# EAGLE board panel (EAGLE 7.5.0)
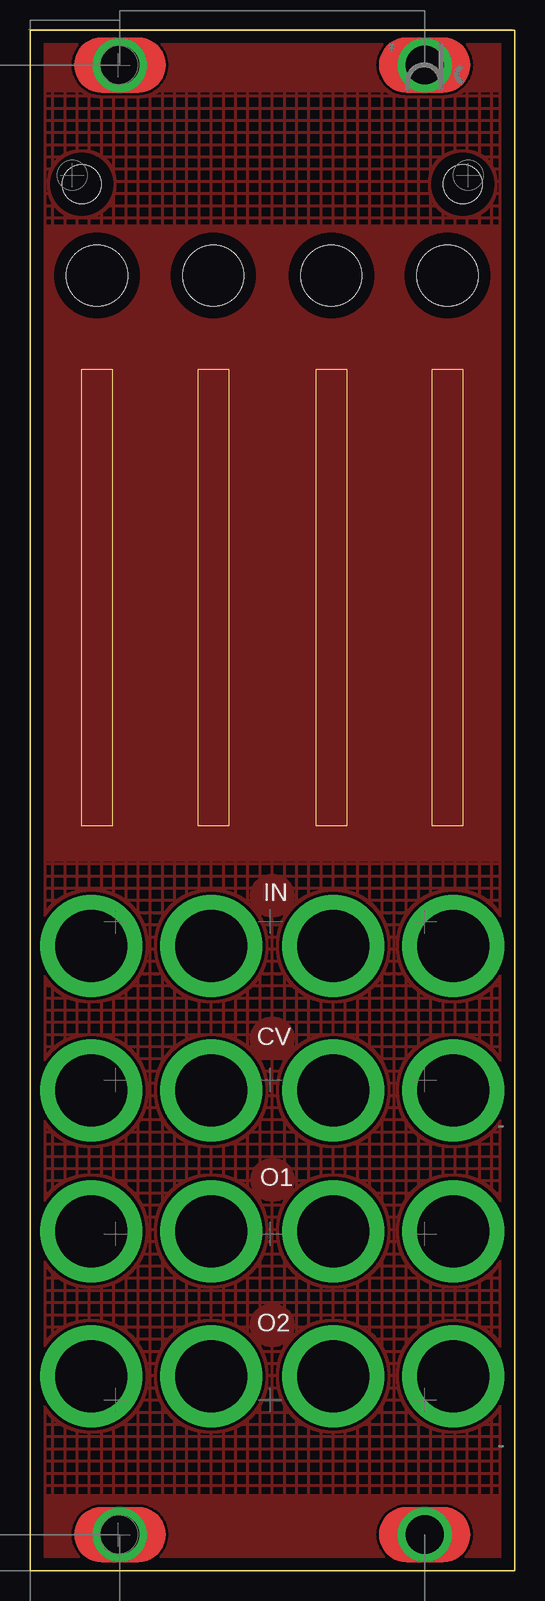
[diagram p0: board, top side]
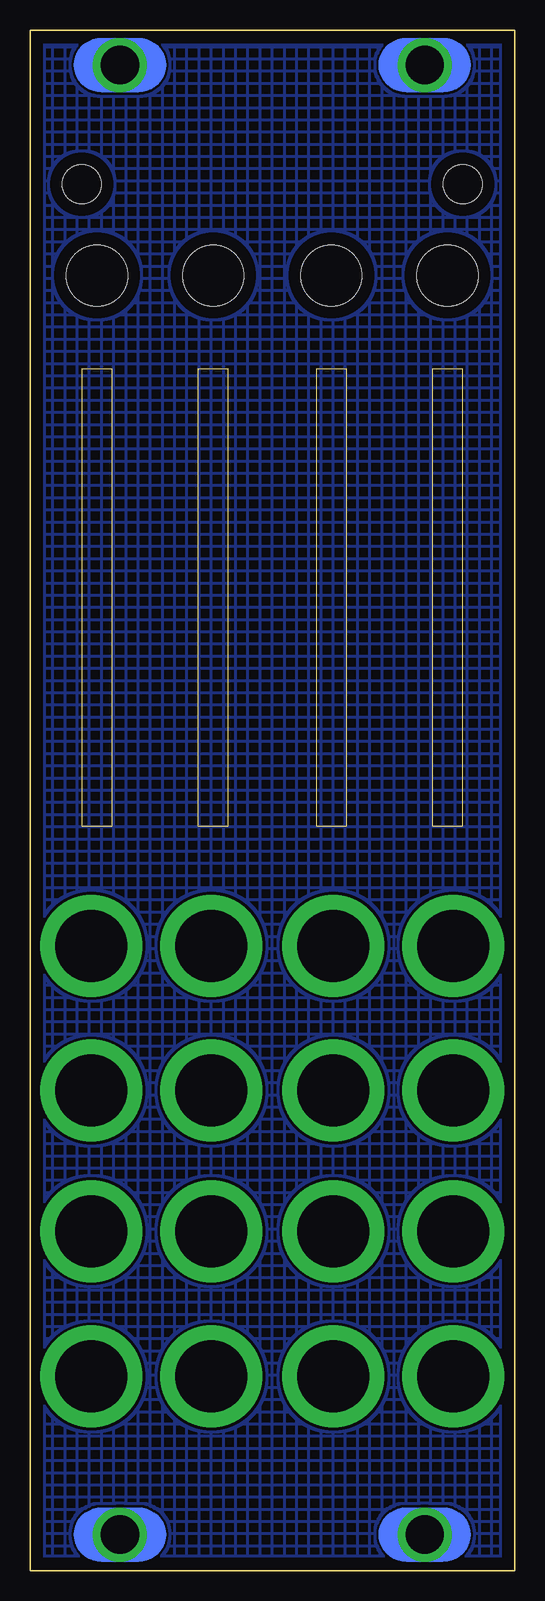
[diagram p1: board, bottom side, seen from below]

Size 40.39 x 128.42 mm. Coordinates in mm from the lower left corner, seen from the top.
Outline: 0,128.42 0,0 40.39,0 40.39,128.42 0,128.42
Copper layers (1*16): Top 0.035mm / dielectric 1.5mm / Bottom 0.035mm
Design rules "default *": minimum track width 10mil, minimum drill 0.61mm, track to track 8mil, track to pad 8mil, pad to pad 8mil, via to via 8mil, smd to smd 8mil, copper to edge 40mil, drill to drill 8mil, minimum pad ring 0mil, minimum via ring 8mil, stop-mask expansion 4mil, vias tented up to drill 15mil, thermal gap 10mil
Net classes: 0 default: width 2.54 mm, drill 0.3 mm, clearance 0.152 mm, clearance 0.152 mm to class 1, clearance 0.152 mm to class 2; 1 hipriority: width 2.54 mm, drill 0.3 mm, clearance 0.152 mm, clearance 0.152 mm to class 0, clearance 0.152 mm to class 2; 2 powa: width 0.305 mm, drill 0.3 mm, clearance 0.152 mm, clearance 0.152 mm to class 0, clearance 0.152 mm to class 1
Holes 3.23 mm at 4.32,115.57 36.07,115.57
Holes 5.08 mm at 25.11,107.95 5.59,107.95 15.27,107.95 34.8,107.95
Milling: 16 lines

## Footprints (pad centres in the part's own frame; a part is rotated, then mirrored left to right if it is on the bottom)
RES_0805 = drill 6 pad 8.5: 1 0,0
Pad = drill 3.2 pad 4.5: 1 0,0

## Placement (x,y rotation side)
Pad1  [RES_0805]  25.27,28.3 0 top
Pad2  [RES_0805]  15.11,16.18 0 top
Pad3  [RES_0805]  5.11,16.18 0 top
Pad4  [RES_0805]  5.11,28.3 0 top
Pad5  [RES_0805]  15.11,28.3 0 top
Pad6  [RES_0805]  25.27,16.18 0 top
Pad7  [RES_0805]  35.28,28.3 0 top
Pad8  [RES_0805]  15.11,40 0 top
Pad9  [RES_0805]  5.11,40 0 top
Pad10  [Pad]  32.89,3 0 top
Pad11  [Pad]  7.49,3 0 top
Pad12  [RES_0805]  35.28,16.18 0 top
Pad13  [Pad]  7.49,125.5 0 top
Pad14  [Pad]  32.89,125.5 0 top
Pad15  [RES_0805]  5.11,52.07 0 top
Pad16  [RES_0805]  15.11,52.07 0 top
Pad17  [RES_0805]  35.28,52.07 0 top
Pad18  [RES_0805]  35.28,40 0 top
Pad19  [RES_0805]  25.27,52.07 0 top
Pad20  [RES_0805]  25.27,40 0 top

## Library data of the parts
Pad1-Pad20 = common

## Tracks (layer width: path | path; a pad name or v marks a point on that pad's centre or on a via)
N$1
  pour Top: 22.06,56.26 21.97,56.81 21.71,57.31 21.29,57.7 20.77,57.96 20.19,58.05 19.61,57.96 19.09,57.7 18.68,57.31 18.41,56.81 18.32,56.26 18.41,55.7 18.68,55.2 19.09,54.81 19.61,54.55 20.19,54.47 20.77,54.55 21.29,54.81 21.71,55.2 21.97,55.7
N$2
  pour Top: 22.06,44.36 21.97,44.91 21.7,45.41 21.29,45.8 20.77,46.06 20.19,46.15 19.61,46.06 19.09,45.8 18.68,45.41 18.41,44.91 18.32,44.36 18.41,43.8 18.68,43.3 19.09,42.91 19.61,42.65 20.19,42.56 20.77,42.65 21.29,42.91 21.7,43.3 21.97,43.8
N$3
  pour Top: 22.09,32.57 22,33.12 21.73,33.62 21.32,34.02 20.8,34.27 20.22,34.36 19.64,34.27 19.12,34.02 18.7,33.62 18.44,33.12 18.35,32.57 18.44,32.01 18.7,31.52 19.12,31.12 19.64,30.86 20.22,30.78 20.8,30.86 21.32,31.12 21.73,31.52 22,32.01
N$4
  pour Top: 22.06,20.46 21.97,21.01 21.7,21.51 21.29,21.91 20.77,22.16 20.19,22.25 19.61,22.16 19.09,21.91 18.68,21.51 18.41,21.01 18.32,20.46 18.41,19.9 18.68,19.4 19.09,19.01 19.61,18.75 20.19,18.67 20.77,18.75 21.29,19.01 21.7,19.4 21.97,19.9
N$5
  pour Bottom (isolate 0.229, hatched): 0.53,127.89 0.53,0.53 39.85,0.53 39.85,127.89
N$6
  pour Top (isolate 0.254, hatched): 0.53,127.89 0.53,0.53 39.85,0.53 39.85,127.89
N$7
  pour Top (isolate 0.33): 0.4,127.84 39.83,127.84 39.83,123.33 0.4,123.33
N$8
  pour Top (isolate 0.254): 0.64,6.22 0.64,0.44 39.75,0.44 39.75,6.22
N$9
  pour Top (isolate 0.254): 1.27,112.11 39.12,112.11 39.12,59.18 1.27,59.18

## Text on the board
tPlace: IN | CV | O1 | O2
tStop: TWiiGS | 1 | 2 | 3 | 4 | Jak Plugg